# Altium PCB ControllableClock.pcbdoc
Units mil, origin at the board's own origin, x right, y up, seen from the top; angles counter-clockwise.
Board outline 728 x 429.54 mil, 2 copper layers (TopLayer, BottomLayer), stack 50.73 mil thick; 5 components, 7 nets, 20 pads, 9 vias.
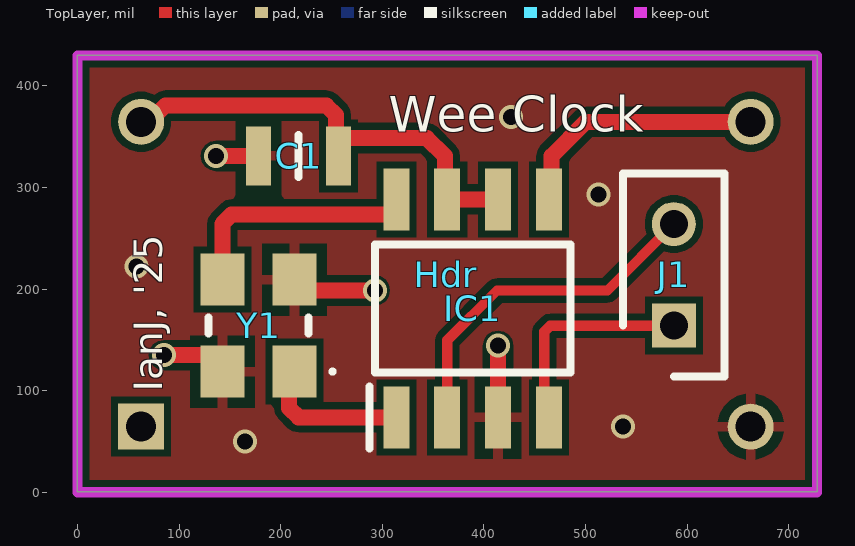
[diagram p0: TopLayer view]
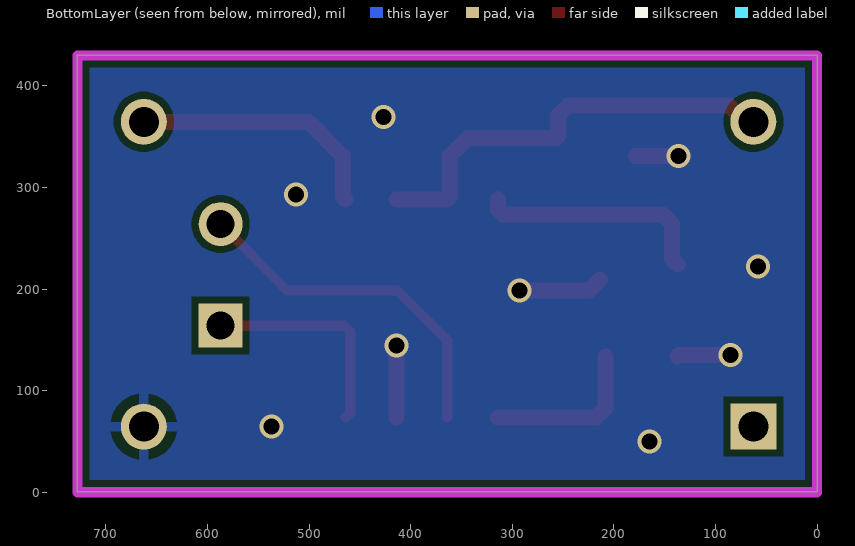
[diagram p1: BottomLayer view, seen from below]
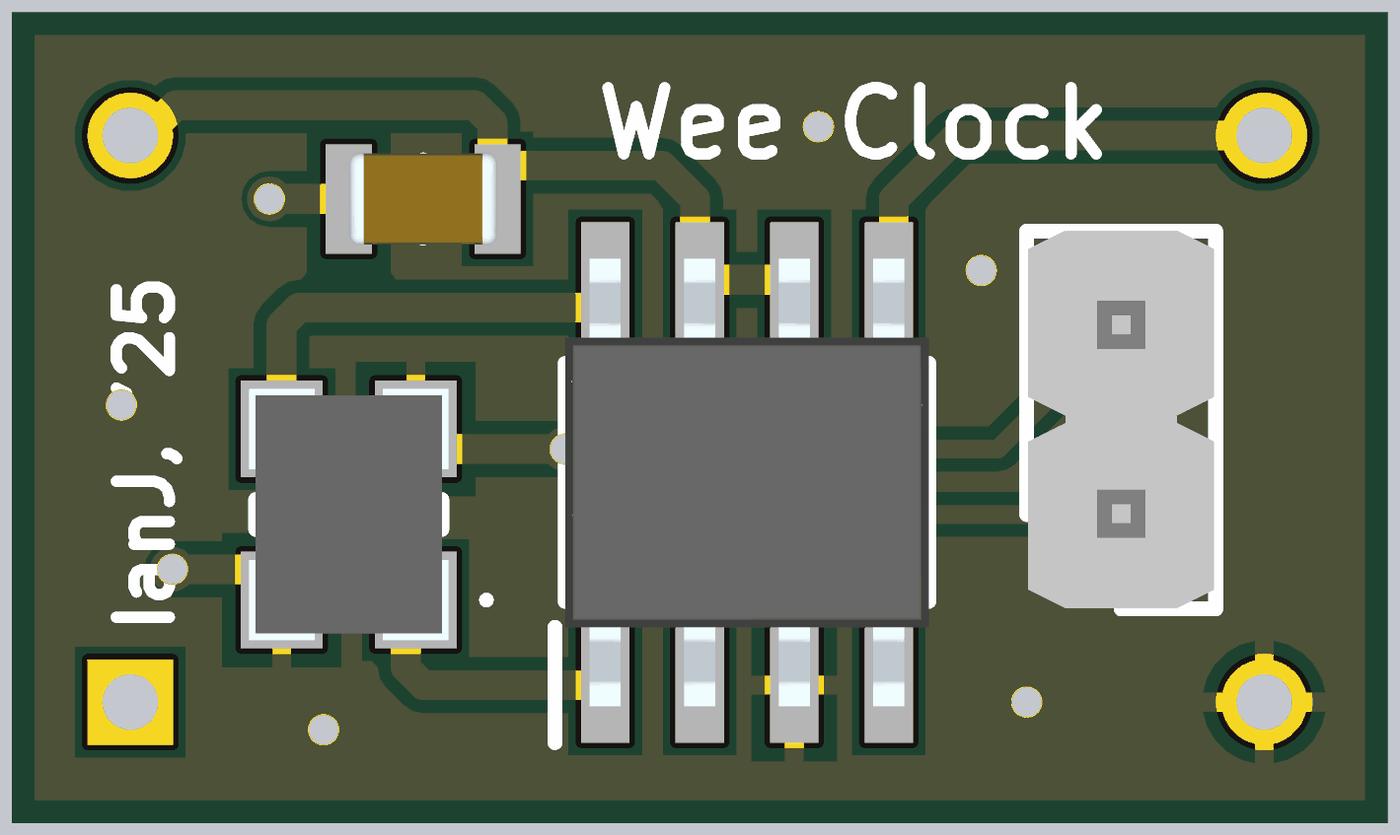
[diagram p2: 3D render of the assembled board from above, using the file's embedded part models]

## Layer stack, top to bottom
TopSolder: solder mask 0.3941, Solder Resist, Dk 3.5
TopLayer: signal copper 1.4169
Dielectric 1: prepreg 8.2, PP-022, Dk 4.5
Dielectric 2: core 31.4961, Core-043, Dk 4.3
Dielectric 3: prepreg 8.2, PP-022, Dk 4.5
BottomLayer: signal copper 1.4169
BottomSolder: solder mask 0.3941, Solder Resist, Dk 3.5

## Board outline
728,0.46 0,0.46 0,430 728,430

## Design rules (kind name [scope] priority, off if disabled: settings)
BoardOutlineClearance [All] p1: gap=11.81 ignorepadtopadclearanceinfootprint=FALSE
Clearance [All] p1: gap=6.69 ignorepadtopadclearanceinfootprint=FALSE except(11.81: Via-Via; 19.68: Via-Hole)
ComponentClearance ComponentClearance_Z2_Z3 [(InComponent('Z2') OR InComponent('Z3')) vs InComponent('No Component')] p1: gap=0 collisioncheckmode=3 verticalgap=0 showdistances=FALSE
ComponentClearance ComponentClearance_U4_J104 [All] p2: gap=0 collisioncheckmode=3 verticalgap=0 showdistances=FALSE
ComponentClearance ComponentClearance_J3_J4 [InComponent('J3') vs InComponent('J4')] p3: gap=0 collisioncheckmode=3 verticalgap=0 showdistances=FALSE
ComponentClearance ComponentClearance_J103_J104 [InComponent('J103') vs InComponent('J104')] p4: gap=0 collisioncheckmode=3 verticalgap=0 showdistances=FALSE
ComponentClearance [All] p5: gap=10 collisioncheckmode=3 verticalgap=10 showdistances=FALSE
DiffPairsRouting [InDifferentialPairClass('All Differential Pairs')] p1: maxlimit=10 minlimit=6.69 mostfreqgap=6.69 toplayer_minwidth=7.87 toplayer_maxwidth=15 toplayer_prefwidth=9.32 bottomlayer_minwidth=7.87 bottomlayer_maxwidth=15 bottomlayer_prefwidth=9.32 maxuncoupledlength=500
FabricationTestPointUsage TestPointUsage [All] p1: valid=0 allowmultiple=FALSE
FabricationTestpoint Testpoint [All] p1: side=3 testpointundercomponent=TRUE minsize=40 maxsize=100 preferedsize=60 minholesize=20 maxholesize=40 preferedholesize=32 testpointgrid=1 allowsidetop=TRUE allowsidebottom=TRUE usegrid=TRUE gridtolerance=0.01
HoleSize [All] p1: absolutevalues=TRUE maxlimit=216.54 minlimit=7.87 maxpercent=80.000 minpercent=20.000
HoleToHoleClearance [All] p1: gap=9.84 allowstackedmicrovias=FALSE
MinimumSolderMaskSliver [All] p1: minsoldermaskwidth=0.79
PlaneClearance [All] p1: clearance=7.87
PlaneConnect [All] p1: pad.planeconnectstyle=Relief pad.reliefexpansion=20 pad.reliefentries=4 pad.reliefconductorwidth=10 pad.reliefairgap=10 via.planeconnectstyle=Direct via.reliefexpansion=20 via.reliefentries=4 via.reliefconductorwidth=10 via.reliefairgap=10
PolygonConnect [All] p1: thpad.connectstyle=Relief thpad.reliefconductorwidth=10 thpad.reliefentries=4 thpad.polygonreliefangle="90 Angle" thpad.airgapwidth=10 smdpad.connectstyle=Relief smdpad.reliefconductorwidth=10 smdpad.reliefentries=4 smdpad.polygonreliefangle="90 Angle" smdpad.airgapwidth=10 via.connectstyle=Direct via.reliefconductorwidth=10 via.reliefentries=4 via.polygonreliefangle="90 Angle" via.airgapwidth=10
RoutingVias [All] p1: holewidth=7.87 width=15.75 viastyle="Through Hole" minholewidth=7.87 minwidth=15.75 maxholewidth=15.75 maxwidth=31.5
SilkToSilkClearance [All] p1: silktosilkclearance=3.94
SilkToSolderMaskClearance SilkscreenOverComponentPads [IsPad] p1: minsilkscreentomaskgap=3.94 clearancetoexposedcopper=TRUE
SolderMaskExpansion [All] p1: expansion=2.95 istentingtop=FALSE
SupplyNets "Schematic Supply Nets_1" [InNet('GND')] p1: voltage=0.000
SupplyNets "Schematic Supply Nets" [InNet('VCC')] p2: voltage=0.000
Width [All] p1: maxlimit=196.85 minlimit=5.91 preferedwidth=7.87
19 further rules are at their usual default settings.

## Classes and differential pairs
component class ControllableClock: C1 IC1 J1 Y1

## Components (designator, comment, footprint, x,y, rotation, side; value= is the part's Value field where it differs from the comment)
C1 "100nF" CAPC2012X145N 217.66,331.08 r180 top
Hdr "" DIPS762W56P1524L1778H241Q4N 62.68,64.68 r90 top locked
IC1 "ICD2053BSC-1" SOIC127P602X173-8N 389,181 r90 top
J1 "90120-0762" HDRV2W35P0X254_1X2_508X249X560P 587,164 r90 top
Y1 "ECS-240-12-33B2Q-JES-TR3" ECS2401233B2QJESTR3 178.29,164 r90 top

## Footprints (in the part's own frame and the unit in brackets; to place one, negate y for a bottom-side part, rotate by r counter-clockwise, add the part's x,y. Pads: shape width x height; smd on the part's side, far side on the other; paste and mask are expansions set on the pad)
CAPC2012X145N [mm]
  rect 0.62x1.47 smd: 1(-1,0) 2(1,0)
  silkscreen extent 0,-0.53 0,0.53, body extent -1,-0.63 1,0.63, height 1.45
DIPS762W56P1524L1778H241Q4N [mm]
  rect 1.15x1.15 hole 0.75: 1(0,0)
  round 1.15 hole 0.75: 2(0,-15.24) 3(7.62,-15.24) 4(7.62,0)
ECS2401233B2QJESTR3 [mm]
  rect 1.3x1.1 smd: 1(-1.15,-0.9) 2(1.15,-0.9) 3(1.15,0.9) 4(-1.15,0.9)
  silkscreen extent -1.2,-1.9 0.2,1.25, body extent -1.69,-1.34 1.69,1.34, height 0.9
HDRV2W35P0X254_1X2_508X249X560P [mm]
  rect 1.1x1.1 hole 0.7: 1(0,0)
  round 1.1 hole 0.7: 2(2.54,0)
  silkscreen extent -1.27,-1.27 3.81,1.27, body extent -1.26,-1.25 3.82,1.25, height 9.18
SOIC127P602X173-8N [mm]
  rect 1.551x0.65 smd: 1(-2.725,1.905) 2(-2.725,0.635) 3(-2.725,-0.635) 4(-2.725,-1.905) 5(2.725,-1.905) 6(2.725,-0.635) 7(2.725,0.635) 8(2.725,1.905)
  silkscreen extent -3.5,-2.44 1.6,2.58, body extent -3.01,-2.44 3.01,2.44, height 1.73

## Part data
C1: library part C2012X7R1H104K125AM, "Capacitor", Manufacturer_Name=TDK, Mouser Part Number=810-C2012X7R1H104KT5, Arrow Part Number=C2012X7R1H104K125AM, Arrow Price/Stock=https://www.arrow.com/en/products/c2012x7r1h104k125am/tdk, Datasheet Link=https://product.tdk.com/info/en/catalog/datasheets/mlcc_commercial_midvoltage_en.pdf, Height=1.45mm, Manufacturer_Part_Number=C2012X7R1H104K125AM, Mouser Price/Stock=https://www.mouser.com/Search/Refine.aspx?Keyword=810-C2012X7R1H104KT5
Hdr: library part 1107741, "Header only", Manufacturer_Name=ARIES, Mouser Part Number=535-1107741, Datasheet Link=http://docs-emea.rs-online.com/webdocs/13f3/0900766b813f3237.pdf, Height=2.41mm, Manufacturer_Part_Number=1107741, Mouser Price/Stock=https://www.mouser.co.uk/ProductDetail/Aries-Electronics/1107741?qs=WZRMhwwaLl%2FApwqojhfzdA%3D%3D
IC1: "Integrated Circuit", Manufacturer_Name="Cypress Semiconductor", Datasheet Link=https://www.datasheetarchive.com/pdf/download.php?id=dd30b21a5d816c93cddfaa73a395283274a84c&type=M&term=ICD2053, Height=1.727mm, Manufacturer_Part_Number=ICD2053BSC-1
J1: "Connector", Manufacturer_Name=Molex, Mouser Part Number=538-90120-0762, Arrow Part Number=90120-0762, Arrow Price/Stock=https://www.arrow.com/en/products/90120-0762/molex?region=nac, Datasheet Link=http://www.molex.com/pdm_docs/sd/901200762_sd.pdf, Height=5.6mm, Manufacturer_Part_Number=90120-0762, Mouser Price/Stock=https://www.mouser.co.uk/ProductDetail/Molex/90120-0762?qs=NKHyz0HolODkarWFh2VFww%3D%3D
Y1: "Crystal or Oscillator", Manufacturer_Name=ECS, Datasheet Link=https://ecsxtal.com/store/pdf/ECX-33B2Q.pdf, Height=0.8mm, Manufacturer_Part_Number=ECS-240-12-33B2Q-JES-TR3

## Via types
v1: diameter 23.62, hole 15.75, TopLayer to BottomLayer, tented both sides, 9 vias

## Nets (pads, with @x,y where several pads share a name; then routed paths per layer and width w, separated by ;. In a path a pad name is that pad's centre, name@x,y a point inside that pad or via, vN(x,y) a via of type N, cw(c..) or ccw(c..) an arc to the next point about the centre after c; other vN are vias at no path point)
CD: IC1.4 J1.1 | length 216.3
  TopLayer w10: IC1.4 459.47,78.24 459.47,158.14 465.33,164 J1.1
CK: IC1.2 J1.2 | length 346.3
  TopLayer w10: IC1.2 364,149.67 413.02,198.68 521.68,198.68 J1.2
GND: C1.2 Hdr.2 IC1.3 Y1.2 Y1.4 | length 249.2
  TopLayer w15.75: v1(85,135) 136.29,135 Y1.4@137.57,133.72 ; v1(136.29,331.08) C1.2 ; Y1.2 224.31,198.68 v1(292.78,198.68) ; IC1.3 v1@414.02,144.34
  other v1: 165,50 537,64.68 414.03,144.36 58,222 512.9,293.19 426.8,369.34
NetHdr_3: Hdr.3 IC1.5 | length 253.7
  TopLayer w15.75: IC1.5 466.63,290.91 466.63,330.89 500.41,364.68 Hdr.3
NetIC1_1: IC1.1 Y1.1 | length 160.2
  TopLayer w15.75: Y1.1@208.43,133.72 208.43,82.94 217.66,73.72 IC1.1
NetIC1_8: IC1.8 Y1.3 | length 229.2
  TopLayer w15.75: Y1.3@137.57,224.28 142.67,229.38 142.67,264.26 151.89,273.49 309.08,273.49 314,278.41 IC1.8
VCC: C1.1 Hdr.4 IC1.6 IC1.7 | length 431.7
  TopLayer w15.75: Hdr.4 70.66,364.68 86.67,380.68 245.13,380.68 254.36,371.46 254.36,351.34 257.03,348.67 343.97,348.67 361.56,331.08 361.56,290.72 IC1.7 IC1.6
pads on no net: Hdr.1

## Polygon pours and split planes (outlines as drawn)
GND on TopLayer "GND_L01_P002" (solid, remove dead copper, pour order 2): 0,430 728,430 728,0.46 0,0.46
GND on BottomLayer "GND_L02_P003" (solid, remove dead copper, pour order 3): 0,0.46 0,430 728,430 728,0.46

## Keep-outs
KeepOutLayer:
  the board outline again, w10

## Silkscreen, mask and mechanical layers (free items; w line width, h text height)
TopOverlay:
  text "Wee Clock" at 306.5,354.67 h35
  text "IanJ, '25" at 83.67,99 h28 r90
Mechanical3:
  the board outline again, w7.87
Mechanical4:
  the board outline again, w8